# Altium PCB PCB1.PcbDoc
Units mm, origin at the board's own origin, x right, y up, seen from the top; angles counter-clockwise.
Board outline 57 x 65 mm, 2 copper layers (Top Layer, Bottom Layer), stack 1.371 mm thick; 12 components, 10 nets, 38 pads, 0 vias.
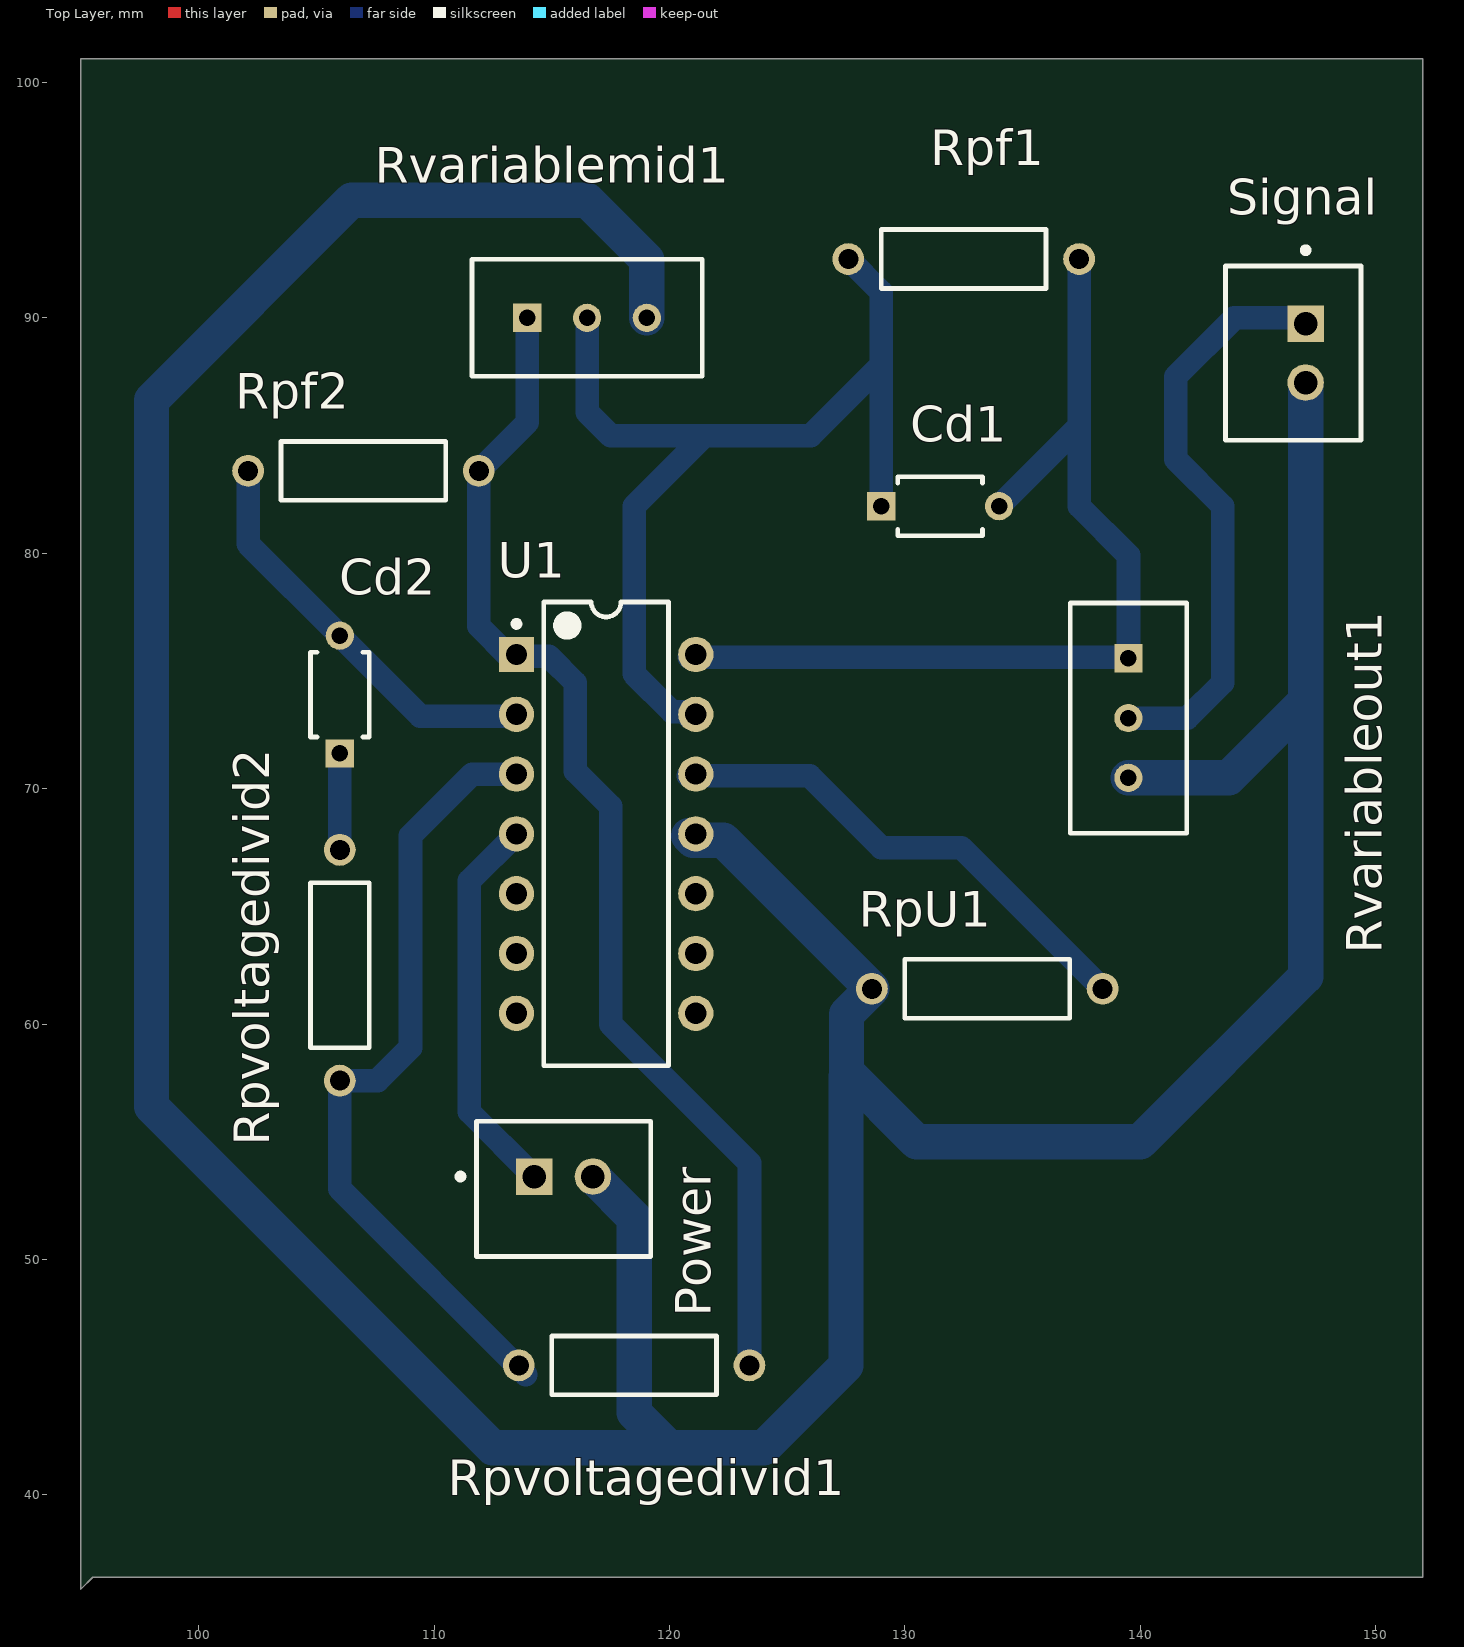
[diagram p0: Top Layer view]
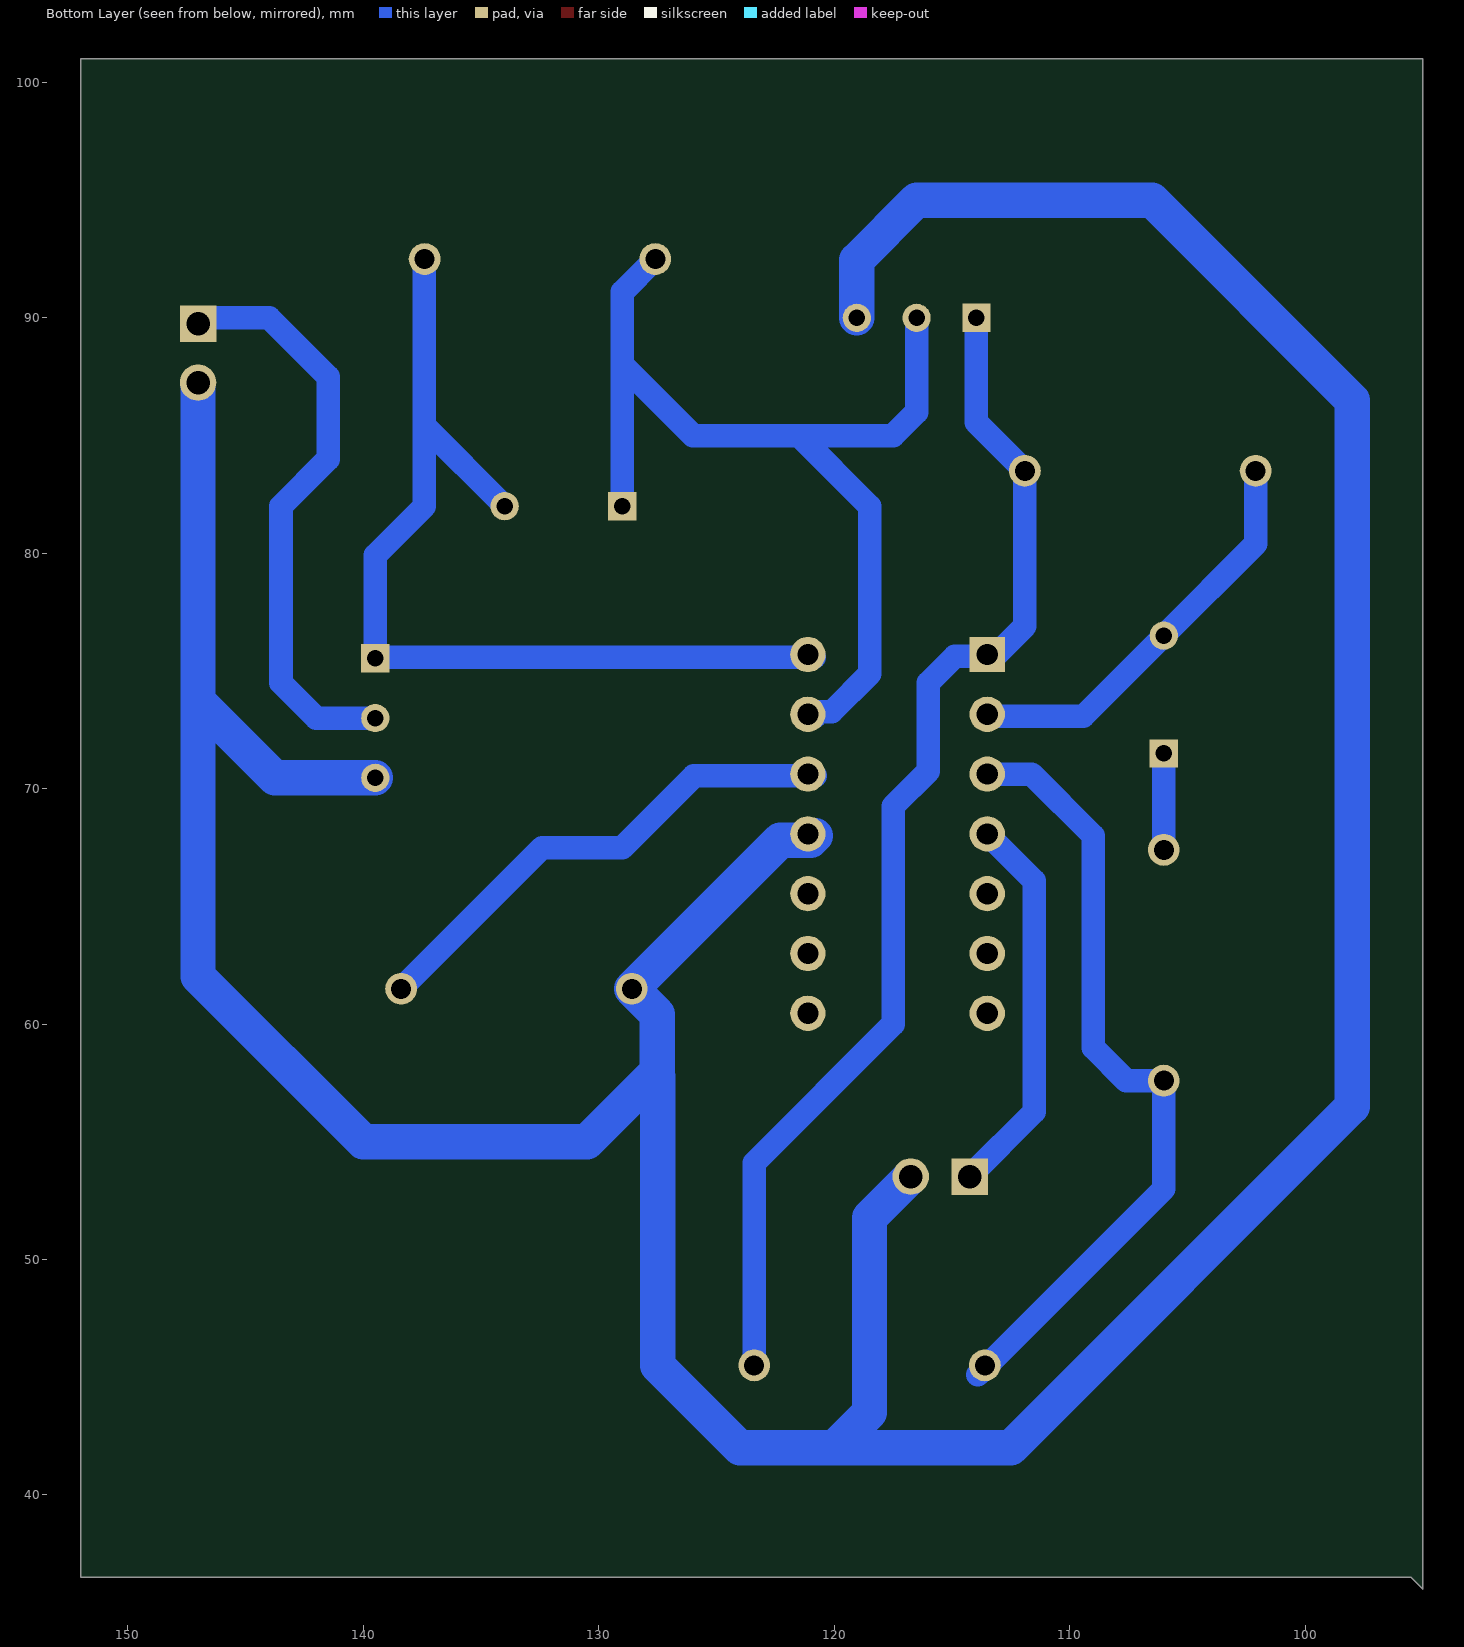
[diagram p1: Bottom Layer view, seen from below]
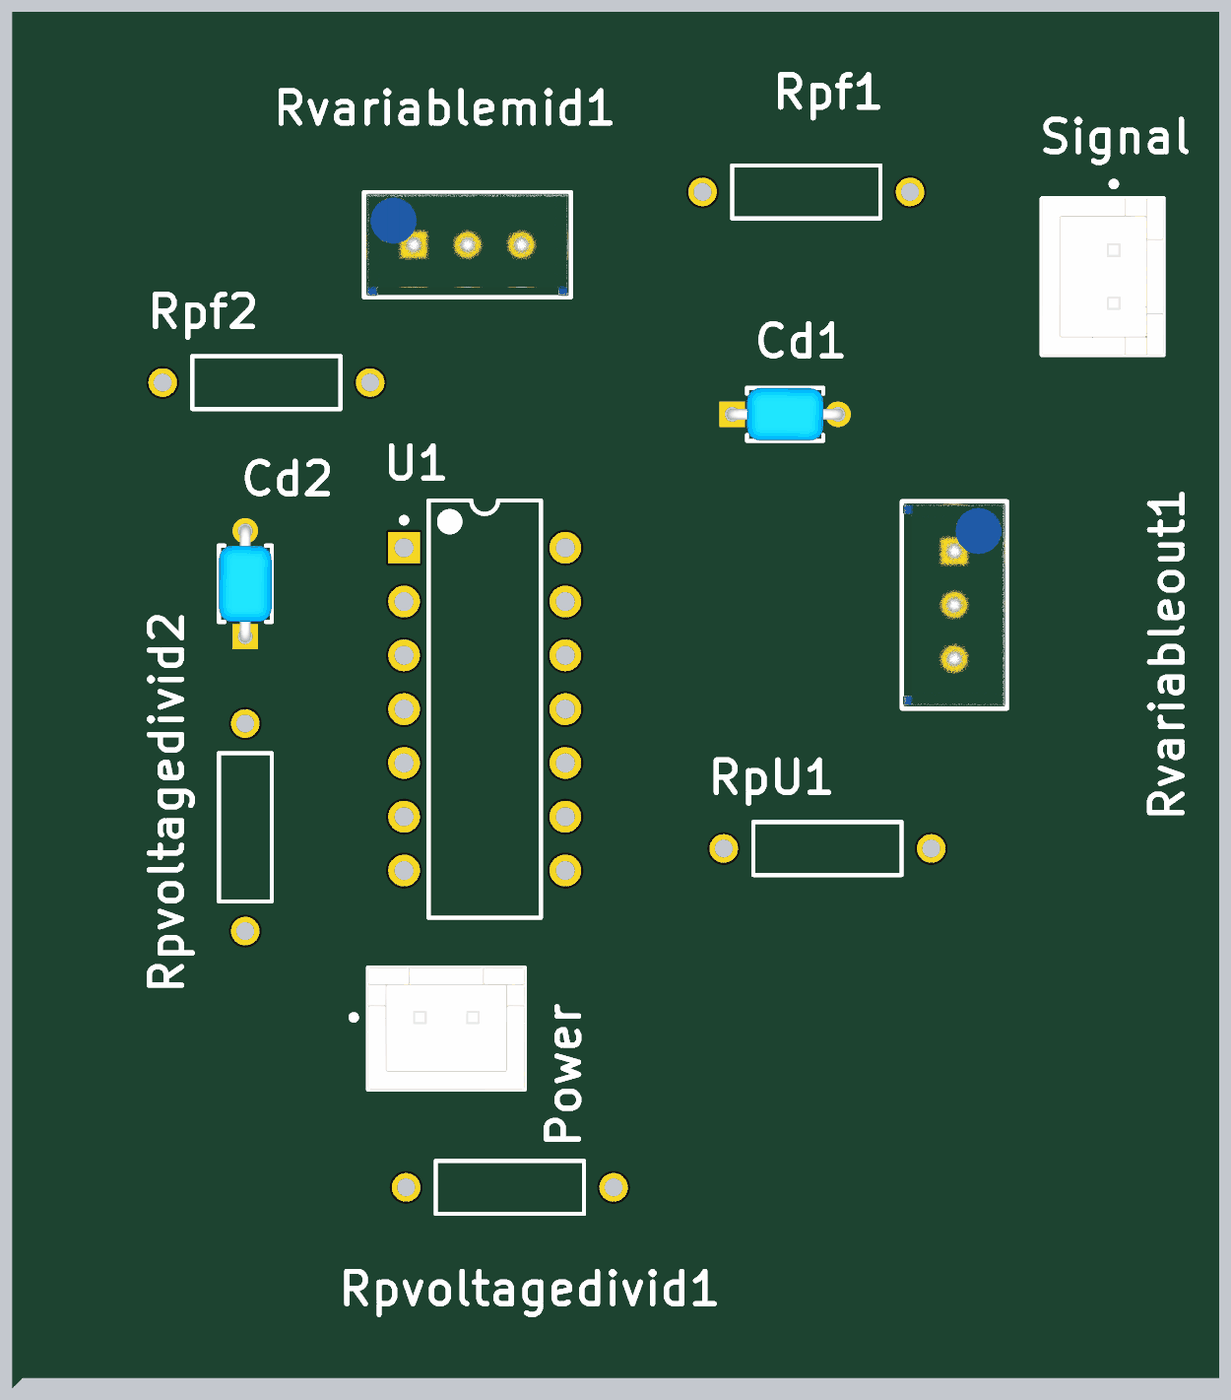
[diagram p2: 3D render of the assembled board from above, using the file's embedded part models]

## Layer stack, top to bottom
Top Solder: solder mask 0.0102, Solder Resist, Dk 3.5
Top Layer: signal copper 0.0356
Dielectric 1: dielectric 1.3, FR-4, Dk 4.8
Bottom Layer: signal copper 0.0356
Bottom Solder: solder mask 0.0102, Solder Resist, Dk 3.5

## Board outline
95,36 95,101 152,101 152,36.5 95.5,36.5

## Design rules (kind name [scope] priority, off if disabled: settings)
Clearance [All] p1: gap=0.3 ignorepadtopadclearanceinfootprint=FALSE
PolygonConnect [All] p1: connectstyle=Relief reliefconductorwidth=0.254 reliefentries=4 polygonreliefangle="90 Angle" airgapwidth=0.254
RoutingVias [All] p1: holewidth=0.7 width=1.27 viastyle="Through Hole" minholewidth=0.7 minwidth=1.27 maxholewidth=0.7 maxwidth=1.27
SilkToSolderMaskClearance [IsPad] p1: minsilkscreentomaskgap=0.2 clearancetoexposedcopper=TRUE
SolderMaskExpansion [All] p1: expansion=0.102 istentingtop=FALSE
Width [All] p1: maxlimit=1.5 minlimit=0.5 preferedwidth=1 minimp=50.000000 maximp=50.000000 favimp=50.000000
29 further rules are at their usual default settings.

## Components (designator, comment, footprint, x,y, rotation, side; value= is the part's Value field where it differs from the comment)
Cd1 "0.1uF" FP-RCE0K1-MFG 131.5,82 r0 top
Cd2 "0.1uF" FP-RCE0K1-MFG 106,74 r90 top
Power "" FP-B2B-XH-A_LF_SN-MFG 115.5,53 r0 top
Rpf1 "330K" OMTE-RES7X2.5-2 132.5,92.5 r0 top
Rpf2 "10K" OMTE-RES7X2.5-2 107,83.5 r0 top
RpU1 "10K" OMTE-RES7X2.5-2 133.5,61.5 r0 top
Rpvoltagedivid1 "10K" OMTE-RES7X2.5-2 118.5,45.5 r0 top
Rpvoltagedivid2 "10K" OMTE-RES7X2.5-2 106,62.5 r270 top
Rvariablemid1 "10K" FP-3296W-MFG 116.5,90.005 r270 top
Rvariableout1 "10K" FP-3296W-MFG 139.5,73 r180 top
Signal "" FP-B2B-XH-A_LF_SN-MFG 146.5,88.5 r270 top
U1 "LM324N" N0014A 117.31,68.08 r0 top

## Footprints (in the part's own frame and the unit in brackets; to place one, negate y for a bottom-side part, rotate by r counter-clockwise, add the part's x,y. Pads: shape width x height; smd on the part's side, far side on the other; paste and mask are expansions set on the pad)
FP-3296W-MFG [mm]
  rect 1.2x1.2 hole 0.7 paste-1000 mask+0: 1(0.005,-2.54)
  round 1.2 hole 0.7 paste-1000 mask+0: 2(0.005,0) 3(0.005,2.54)
  silkscreen extent -2.48,-4.89 2.48,4.89, body extent -2.58,-4.99 2.58,4.99, height 0.25
FP-B2B-XH-A_LF_SN-MFG [mm]
  rect 1.55x1.55 hole 1 paste-1000 mask+0: 1(-1.25,0.525)
  round 1.55 hole 1 paste-1000 mask+0: 2(1.25,0.525)
  silkscreen extent -4.5,-2.88 3.7,2.88, body extent -3.8,-2.98 3.8,2.98, height 0.25
FP-RCE0K1-MFG [mm]
  rect 1.2x1.2 hole 0.7 paste-1000 mask+0: 1(-2.5,0)
  round 1.2 hole 0.7 paste-1000 mask+0: 2(2.5,0)
  silkscreen extent -1.8,-1.25 1.8,1.25, body extent -3.2,-1.35 3.2,1.35, height 0.25
N0014A [mm] "DIP, 14-Leads, Body 19.7x6.6mm, Pitch 2.54mm"
  rect 1.5x1.5 hole 0.9: 1(-3.81,7.62)
  round 1.5 hole 0.9: 2(-3.81,5.08) 3(-3.81,2.54) 4(-3.81,0) 5(-3.81,-2.54) 6(-3.81,-5.08) 7(-3.81,-7.62) 8(3.81,-7.62) 9(3.81,-5.08) 10(3.81,-2.54) 11(3.81,0) 12(3.81,2.54) 13(3.81,5.08) 14(3.81,7.62)
  silkscreen extent -3.93,-9.85 2.65,9.85, body extent -3.95,-9.85 3.95,9.85, height 5.08
OMTE-RES7X2.5-2 [mm] "Resistor, Axial; Body 7x2.5mm, Lead Dia. 0.6mm"
  round 1.35 hole 0.85: 1(-4.9,0) 2(4.9,0)
  silkscreen extent -3.5,-1.25 3.5,1.25, body extent -3.5,-1.25 3.5,1.25, height 2.5

## Part data
Cd1 Cd2: library part CMP-06035-026251-1, "Cap Ceramic 27pF 50V C0G ±5% Radial 5mm +125°C Automotive Bulk", Capacitance=27pF, Case/Package=Radial, Dielectric=C0G, Max Operating Temperature=125°C, Min Operating Temperature=-55°C, Package Quantity=1, Ratings=AEC-Q200, Resistor Type=Ceramic, Tolerance=5%, Voltage Rating=50V, Height=3.5mm, Height - Seated (Max)=0.138inch, Lead Diameter=0.5mm, Lead Pitch=0.197inch, Lead/Base Style="Formed Leads", Length=0.142inch, Mount="Through Hole", Packaging="Tape and Reel", Termination=Radial, Voltage Rating (DC)=50V, Width=0.098inch
Power Signal: library part CMP-2000-05888-3, "CONN HEADER VERT 2POS 2.5MM", Color=Natural, Contact Resistance=20mR, Current Rating=3A, Housing Color=White, Insulation Resistance=1GR, Max Operating Temperature=85°C, Max Voltage Rating (AC)=250V, Min Operating Temperature=-25°C, Connector Type="Male Pin", Contact Material=Brass, Contact Plating=Tin, Contact Type="Male Pin", Depth=5.75mm, Fastening Type=Detent, Housing Material=Polyamide, Lead Free="Lead Free", Lead Pitch=2.5mm, Length=7.4mm, Max Current Rating=3A, Max Voltage Rating (DC)=250V, Mount="Through Hole", Number Of Contacts=2, Number of Positions=2, Number Of Rows=1, Orientation=Straight, Packaging=Bulk, Pitch=2.5mm, REACH SVHC="No SVHC", Series=XH, Termination=Solder, Voltage Rating=250V, Voltage Rating (AC)=250V, Wire/Cable Gauge=22AWG
Rpf1 Rpf2 RpU1 Rpvoltagedivid1 Rpvoltagedivid2: library part CMP-2000-06865-1, "Little Demon(R) Carbon Composition Molded OD Series, 250 V, 10 KOhm, +/-5%, -70 to 130 degC, 2-Pin THD, RoHS, Bulk", Manufacturer=Ohmite, Operating Temperature=-, Package / Case=Axial, Package Description="2-Pin THD Resistor, Body 7 x 2.5 mm, Lead Dia. 0.6 mm", Package Reference=RES7X2.5, PartNumber=OD103JE, Power (Watts)=0.25W,1/4W, Power Rating=0.25W, Resistance (Ohms)=10k, Standard Package=100, Tolerance=±5%, Catalog Drawings=OD,OF,OASeries, Category=Resistors, Composition=CarbonComposition, Datasheet URL=http://www.ohmite.com/cat/res_od_of_oa.pdf, Datasheet Version=06/2016, EDA / CAD Models=DownloadfromAcceleratedDesigns, Family=ThroughHoleResistors, Features=PulseWithstanding, Height=-, Manufacturer URL=http://www.ohmite.com/, Mounting Technology=ThroughHole, Number of Terminations=2, Online Catalog=OD,OF,OASeries,LittleDemon®, Packaging=Bulk, RoHS Information="LittleDemon\"E\"SeriesMaterialDeclaration", Series=LittleDemon®OD, Size / Dimension="0.098\"Diax0.276\"L(2.50mmx7.00mm)", Supplier Device Package=Axial, Temperature Coefficient=-
Rvariablemid1 Rvariableout1: library part CMP-07234-000043-1, "TRIMMER 50K OHM 0.5W PC PIN TOP", Color=Blue, Insulation Resistance=1GR, Manufacturer Series=3296, Max Operating Temperature=125°C, Max Power Dissipation=500mW, Min Operating Temperature=-55°C, Package Quantity=50, Resistance=50kR, Resistance Law=Linear, Resistance Tolerance=10%, Resistor Type=Cermet, Temperature Coefficient=100ppm/°C, Actuator Orientation=Vertical, Actuator Type=SCREW, Contact Plating=Tin, Depth=4.83mm, Height=0.395inch, Lead Free="Lead Free", Length=9.53mm, Military Standard=Not, Mount=Panel, Number of Pins=3, Number of Terminals/Pins=3, Number of Turns=25, Packaging=Rail/Tube, Power Rating=500mW, Radiation Hardening=No, REACH SVHC="No SVHC", RoHS Compliant=Yes, Series=3296, Taper=Linear, Technology=CERMET, Terminal Finish=Tin, Termination=Pin, Tolerance=10%, Type=Potentiometer, Weight=0.03oz, Width=9.53mm
U1: library part CMP-0055-00082-3, "Low Power Quad Operational Amplifier, 14-pin MDIP", Manufacturer="Texas Instruments", Package Reference=N0014A, PackageTopMarking=NSUZXYYTTE#*LM324N, PowerWise=N, Code_JEDEC=MS-001-AA, ComponentLink1Description="Datasheet URL", ComponentLink1URL=http://www.ti.com/general/docs/lit/getliterature.tsp?genericPartNumber=LM324&fileType=pdf, CompType=Amplifiers, PackageDescription="MDIP, .750 x .250 x.130in, 14 Lead, .100in Pitch", PinCount=14, RoHS=N

## Nets (pads, with @x,y where several pads share a name; then routed paths per layer and width w, separated by ;. In a path a pad name is that pad's centre, name@x,y a point inside that pad or via, vN(x,y) a via of type N, cw(c..) or ccw(c..) an arc to the next point about the centre after c; other vN are vias at no path point)
NetCd1_1: Cd1.1 Rpf1.1 Rvariablemid1.2 U1.13 | length 43.7
  Bottom Layer w1: Rvariablemid1.2 116.5,86 117.5,85 121.5,85 ; U1.13@120.81,73.08 120.81,73.115 120.658,73.267 120.106,73.267 118.5,74.873 118.5,82 121.5,85 ; Rpf1.1 129,91.1 129,88 ; Cd1.1 129,88 ; 121.5,85 126,85 129,88
NetCd1_2: Cd1.2 Rpf1.2 Rvariableout1.1 U1.14 | length 41.3
  Bottom Layer w1: U1.14@120.85,75.58 139.455,75.58 Rvariableout1.1 139.5,75.545 139.5,79.911 137.411,82 137.411,85.411 ; Cd1.2 137.411,85.411 ; Rpf1.2@137.411,92.489 137.411,85.411
NetCd2_1: Cd2.1 Rpvoltagedivid2.1 | length 4.1
  Bottom Layer w1: Rpvoltagedivid2.1 Cd2.1
NetCd2_2: Cd2.2 Rpf2.1 U1.2 | length 17.2
  Bottom Layer w1: Rpf2.1 102.1,80.4 Cd2.2 109.42,73.08 U1.2@113.19,73.08
NetPower_1: Power.1 U1.4 | length 16.5
  Bottom Layer w1: U1.4 111.5,66.08 111.5,56.275 Power.1
NetPower_2: Power.2 RpU1.1 Rvariablemid1.3 Rvariableout1.3 Signal.2 U1.11 | length 192.7
  Bottom Layer w1.5: Power.2 118.5,51.775 118.5,43.5 120,42 ; Rvariablemid1.3 119.04,92.46 116.5,95 106.5,95 98,86.5 98,56.5 112.5,42 120,42 ; U1.11@120.81,68 121.001,67.809 122.291,67.809 RpU1.1 127.52,60.42 127.52,57.773 127.656,57.637 ; 127.5,57.773 127.5,45.5 124,42 120.5,42 120,42 ; 127.52,57.98 130.5,55 140,55 147.025,62.025 Signal.2 ; Rvariableout1.3 143.753,70.46 147,73.707
NetRpf2_2: Rpf2.2 Rpvoltagedivid1.2 Rvariablemid1.1 U1.1 | length 51.1
  Bottom Layer w1: Rvariablemid1.1 113.96,85.56 Rpf2.2 111.9,76.91 113.19,75.62 114.88,75.62 116,74.5 116,70.75 117.5,69.25 117.5,60 123.4,54.1 Rpvoltagedivid1.2
NetRpU1_2: RpU1.2 U1.12 | length 21.3
  Bottom Layer w1: U1.12@120.81,70.54 125.96,70.54 129,67.5 132.4,67.5 RpU1.2
NetRpvoltagedivid1_1: Rpvoltagedivid1.1 Rpvoltagedivid2.2 U1.3 | length 33.9
  Bottom Layer w1: U1.3 111.62,70.62 109,68 109,59 107.6,57.6 Rpvoltagedivid2.2 106,53 Rpvoltagedivid1.1@113.894,45.106
NetRvariableout1_2: Rvariableout1.2 Signal.1 | length 25.1
  Bottom Layer w1: Rvariableout1.2 142,73 143.5,74.5 143.5,82 141.5,84 141.5,87.5 144,90 146.775,90 Signal.1
pads on no net: U1.5 U1.6 U1.7 U1.8 U1.9 U1.10

## Silkscreen, mask and mechanical layers (free items; w line width, h text height)
Mechanical 1:
  the board outline again, w0.254